# Altium PCB S7CAS-PLEIADES-CARTE-MERE_P01.PcbDoc (part 5 of 9)
Units mil, origin at the board's own origin, x right, y up, seen from the top; angles counter-clockwise.
Board outline 6153 x 3696 mil, 16 copper layers (Top, Ground Plane 1, Signal Layer 1, Ground Plane 2, Signal Layer 2, Ground Plane 3, Power Plane, Ground Plane 4, Ground Plane 5, Power Plane 2, Ground Plane 6, Signal Layer 3, Ground Plane 7, Signal Layer 4, Ground Plane 8, Bottom), stack 75.282 mil thick; 430 components, 328 nets, 2174 pads, 2158 vias.
Unrouted connection lines stored in the file: 202.
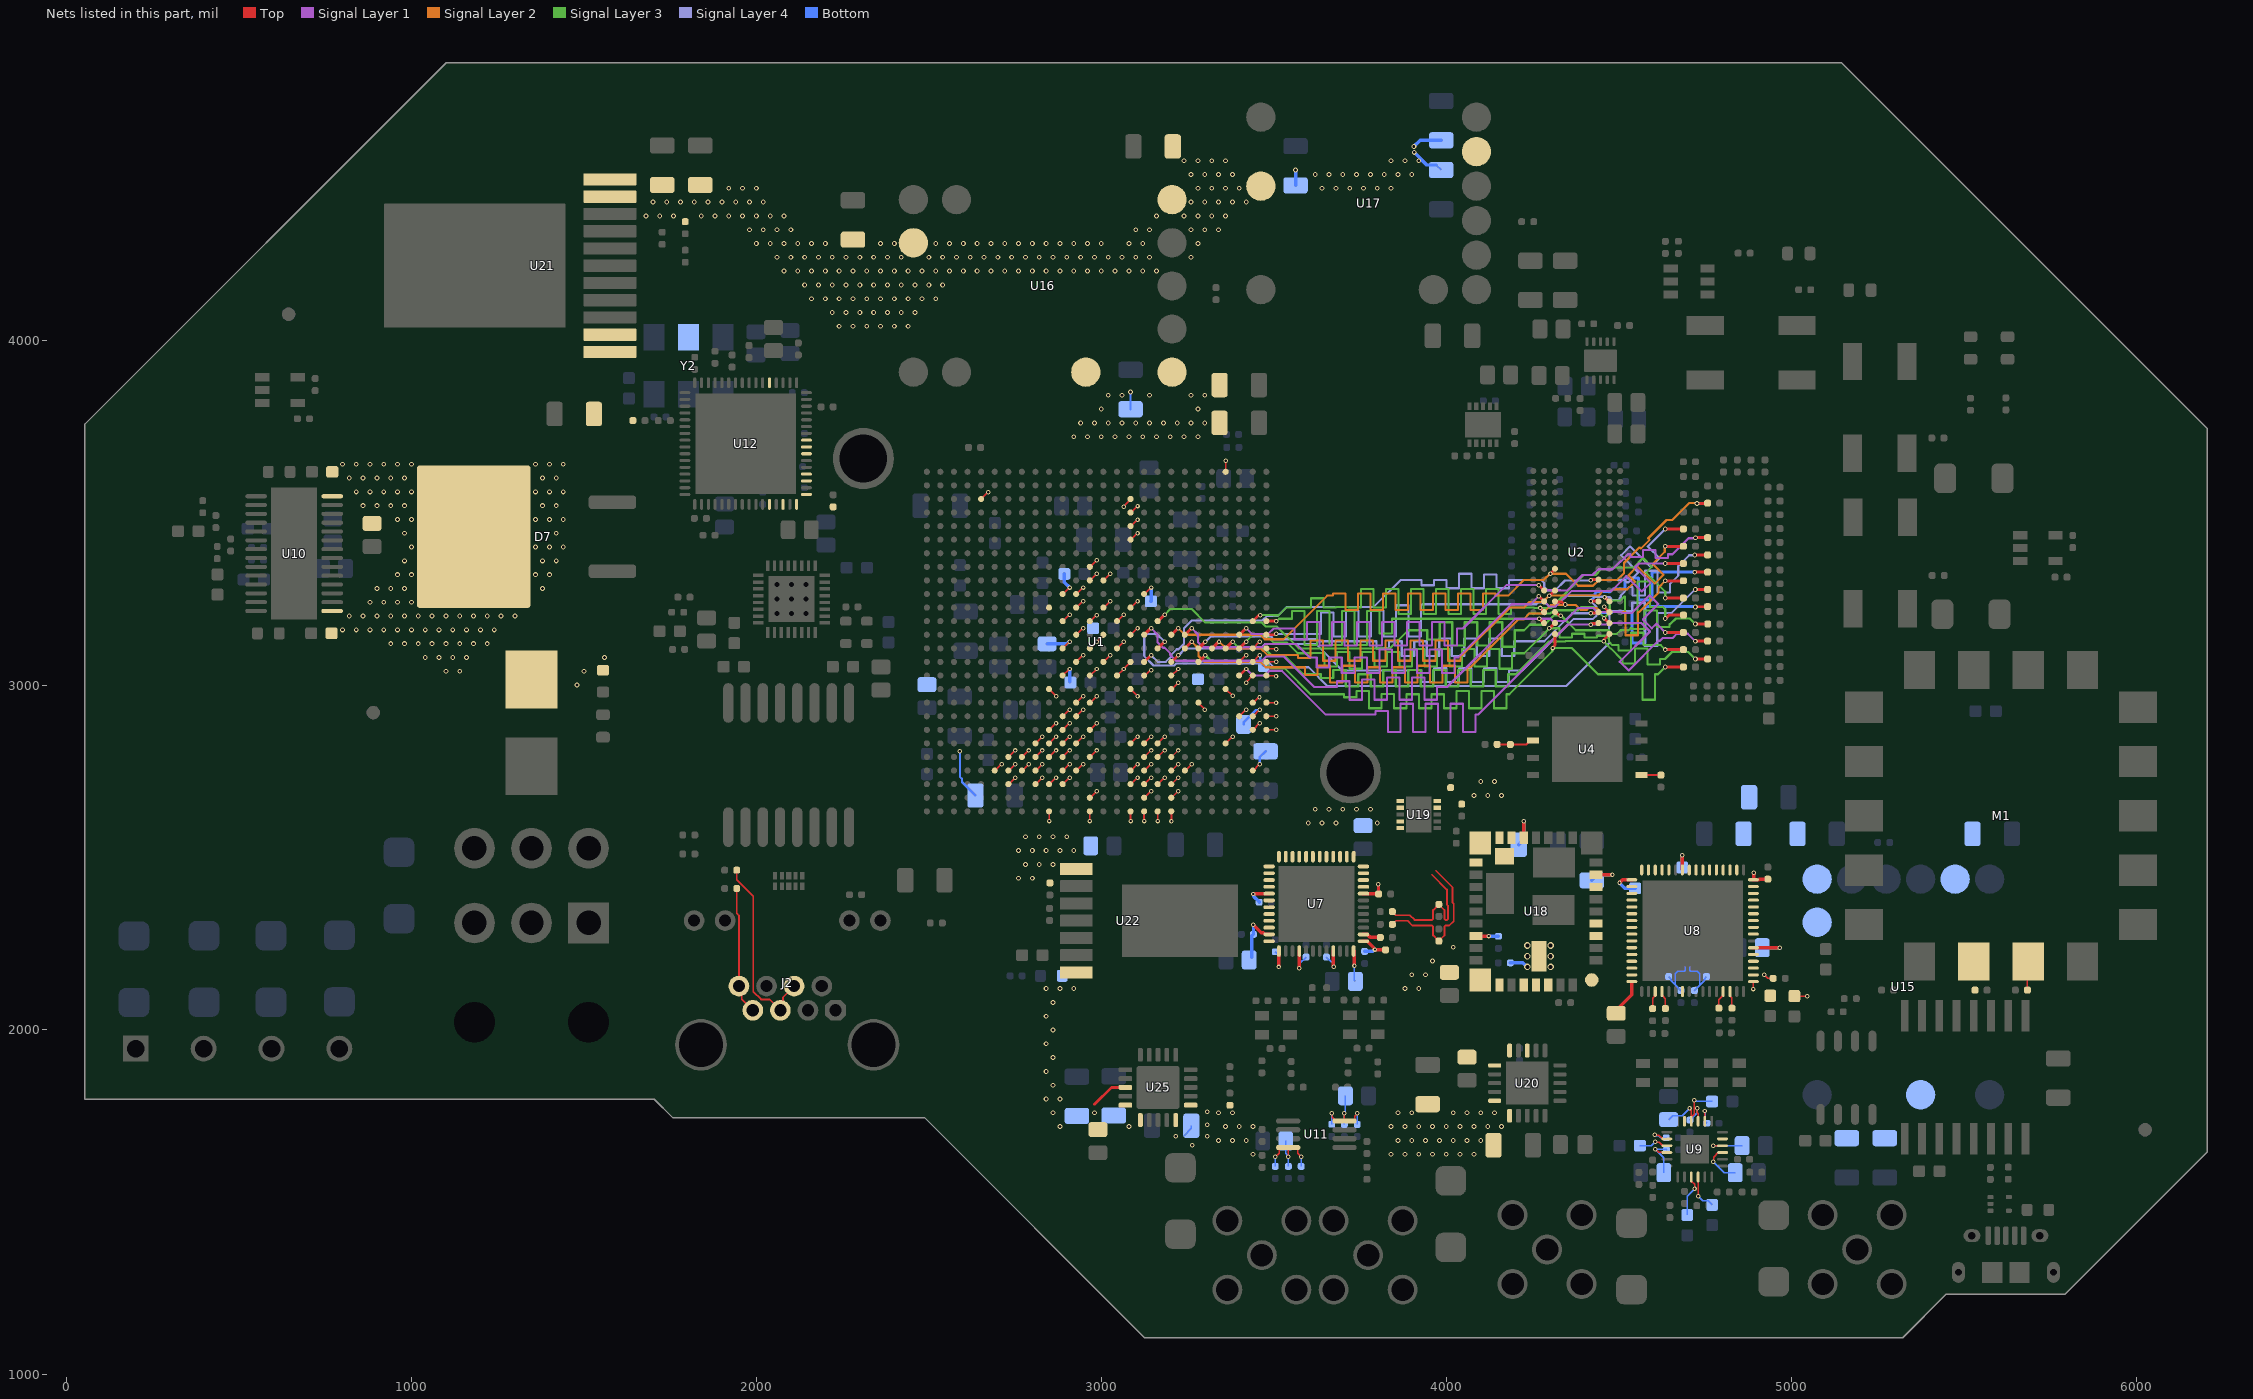
[diagram p17: the nets of this part, all layers, seen from the top]

## Via types
v1: diameter 14, hole 8, Top to Bottom, 1322 vias
v2: diameter 13, hole 7, Top to Bottom, 662 vias
v3: diameter 19.68, hole 7.87, Top to Bottom, 137 vias
v4: diameter 19.68, hole 11.81, Top to Bottom, 15 vias
v5: diameter 15.75, hole 7.87, Top to Bottom, 12 vias
v6: diameter 22, hole 12, Top to Bottom, 9 vias
v7: diameter 20, hole 12, Top to Bottom, 1 vias

## Nets (pads, with @x,y where several pads share a name; then routed paths per layer and width w, separated by ;. In a path a pad name is that pad's centre, name@x,y a point inside that pad or via, vN(x,y) a via of type N, cw(c..) or ccw(c..) an arc to the next point about the centre after c; other vN are vias at no path point) (continued)
DDR3_CAS: (continued)
  Signal Layer 2 w6.24: v2(3223.03,3164.6) 3241.85,3145.78 3460.79,3145.78 3473.79,3132.78 3528.39,3132.78 3654.82,3259.22 3667.99,3259.22 3671.11,3259.22 3671.11,3265.57 3707.35,3265.57 3707.35,3217.49 3743.6,3217.49 3743.6,3265.57 3779.84,3265.57 3779.84,3217.49 3816.08,3217.49 3816.08,3265.57 3852.32,3265.57 3852.32,3217.49 3888.56,3217.49 3888.56,3265.57 3924.81,3265.57 3924.81,3217.49 3961.05,3217.49 3961.05,3265.57 3997.29,3265.57 3997.29,3217.49 4033.53,3217.49 4033.53,3265.57 4069.77,3265.57 4069.77,3217.49 4106.02,3217.49 4106.02,3265.1 4142.26,3265.1 4142.26,3259.22 4173.29,3259.22 4179.4,3259.22 4224.47,3304.29 4261.69,3304.29 4262.07,3304.67 4275.01,3304.67 4275.39,3304.29 4282.01,3304.29 4301.24,3323.52 4301.24,3324.92 v2@4302.79,3323.37 ; v2@4303.54,3322.62 v2(4302.03,3322.62) 4347.16,3322.62 4382.14,3287.64 4425.45,3287.64 4441.92,3304.11 4494.61,3304.11 4514.98,3324.48 4514.98,3353.86 4560.22,3399.11 4563.82,3395.51 4589.45,3421.14 4585.24,3425.35 4587.44,3427.55 4638.35,3478.46 4654.98,3478.46 4703.81,3527.29 4725.28,3527.29 v1(4726.48,3526.09)